# EAGLE board Ard_Frd_ShieldTemplate (EAGLE 5.11)

Size 68.58 x 53.34 mm. Coordinates in mm from the lower left corner, seen from the top.
Outline: 0,53.34 0,0 68.58,0 68.58,53.34 0,53.34
Copper layers (1*16): Top 0.035mm / dielectric 1.5mm / Bottom 0.035mm
Design rules "default *": minimum track width 2mil, minimum drill 2mil, track to track 2mil, track to pad 2mil, pad to pad 2mil, via to via 2mil, smd to smd 2mil, copper to edge 20mil, drill to drill 20mil, minimum pad ring 10mil, minimum via ring 8mil, stop-mask expansion 1mil, vias tented up to drill 2mil, thermal gap 10mil
Net classes: 0 default: width 0.152 mm, drill 0.61 mm, clearance 0.152 mm; 1 power: width 0.152 mm, drill 0.61 mm, clearance 0.152 mm; 2 VIN: width 0.61 mm, drill 0.813 mm; 3 usbvcc: width 0.508 mm, drill 0.711 mm, clearance 0.254 mm
Holes 3.2 mm at 66.04,35.56 66.04,7.62 15.24,50.67

## Footprints (pad centres in the part's own frame; a part is rotated, then mirrored left to right if it is on the bottom)
2X03 = drill 1.016 octagon: 1 -2.54,-1.27; 2 -2.54,1.27; 3 0,-1.27; 4 0,1.27; 5 2.54,-1.27; 6 2.54,1.27
1X08 = drill 1.016 long: 1 -8.89,0; 2 -6.35,0; 3 -3.81,0; 4 -1.27,0; 5 1.27,0; 6 3.81,0; 7 6.35,0; 8 8.89,0
1X06 = drill 1.016 long: 1 -6.35,0; 2 -3.81,0; 3 -1.27,0; 4 1.27,0; 5 3.81,0; 6 6.35,0

## Placement (x,y rotation side)
ICSP  ICSP  [2X03]  64.9,27.94 270 top
J1  [1X08]  32.77,50.8 180 top
J2  [1X06]  57.15,2.54 0 top
J3  [1X08]  54.61,50.8 180 top
POWER  [1X06]  39.37,2.54 0 top

## Library data of the parts
ICSP J1-J3 POWER = pinhead

## Nets
AREF: J1.8

## Text on the board
tPlace: 9 | 8 | 7 | 6 | 5 | 4 | 3 | 2 | 1 | 0 | 13 | 12 | 11 | 10
tNames: TX | RX | GND | AREF | ANALOG IN | RESET | 3V3 | 5V Gnd 9V | A0 1 2 3 4 5